# Altium PCB RNG_SATA.PcbDoc (part 1 of 2)
Units mm, origin at the board's own origin, x right, y up, seen from the top; angles counter-clockwise.
Board outline 120 x 50.5 mm, 2 copper layers (TOP, BOT), stack 1.57 mm thick; 83 components, 48 nets, 231 pads, 421 vias.
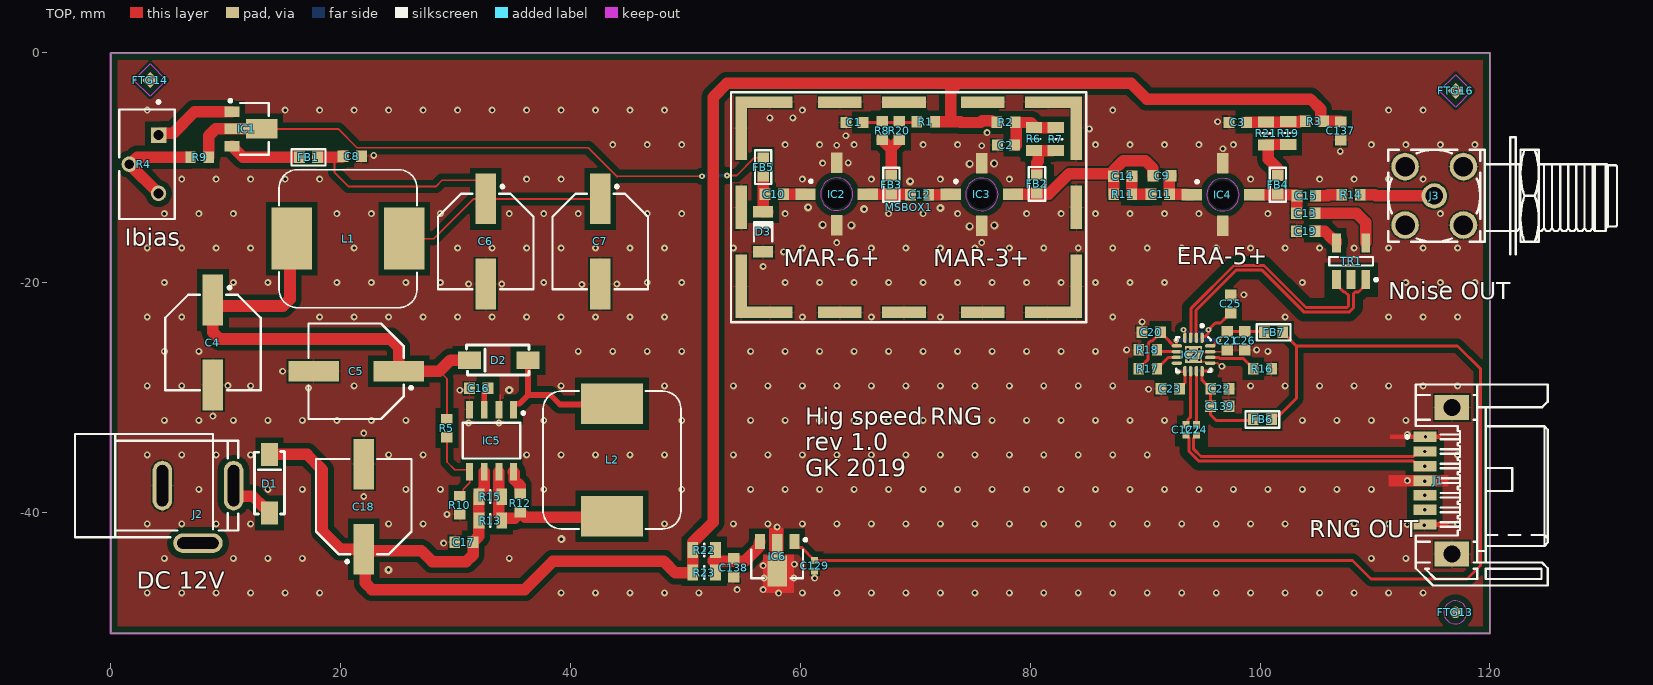
[diagram p0: TOP view]
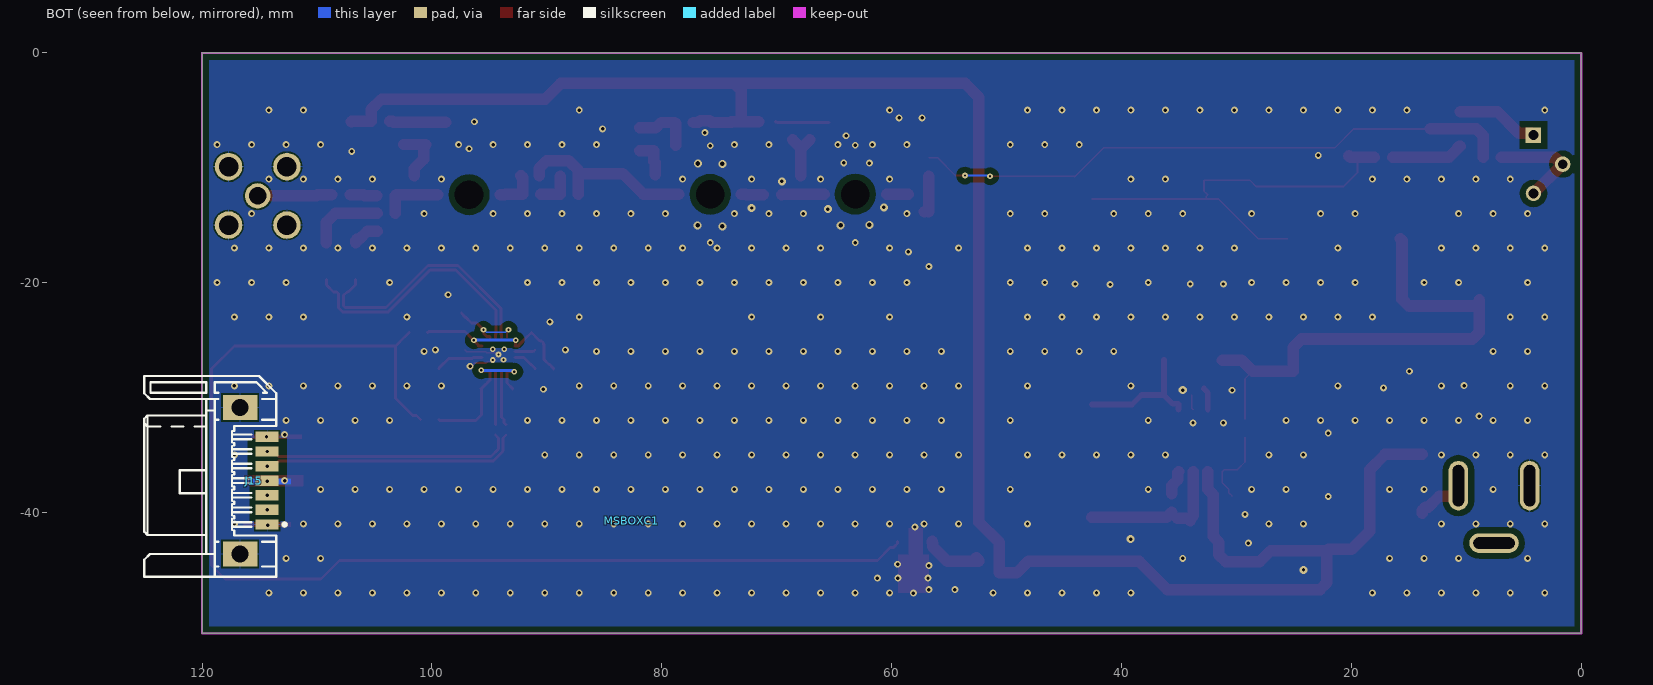
[diagram p1: BOT view, seen from below]
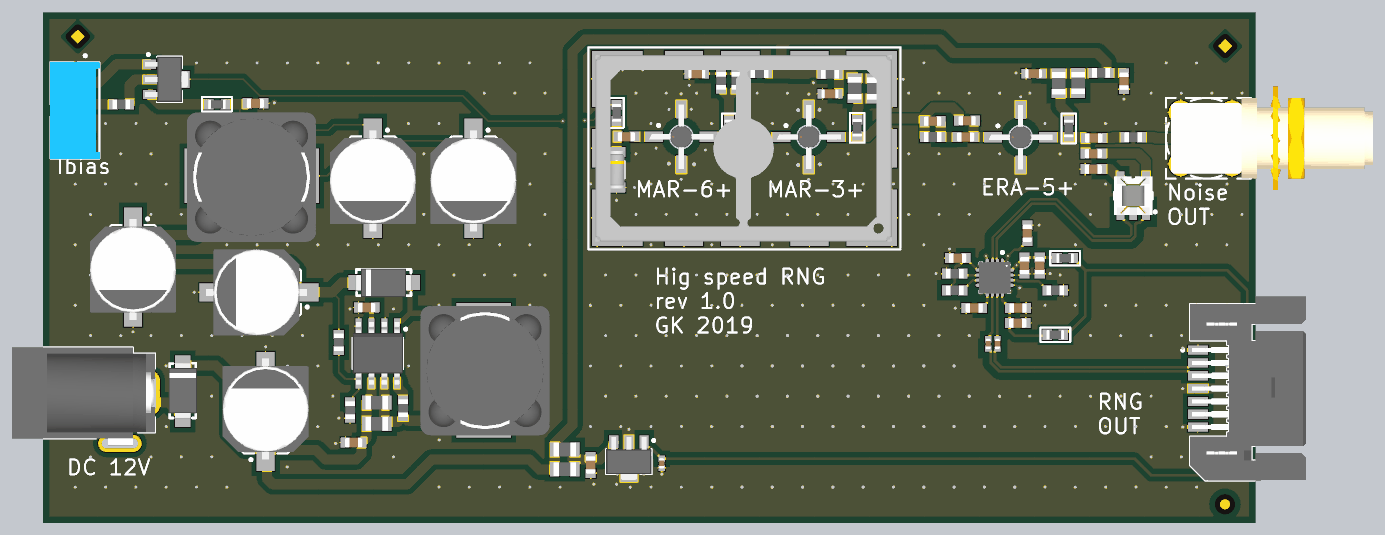
[diagram p2: 3D render of the assembled board from above, using the file's embedded part models]

## Layer stack, top to bottom
TopSolder: solder mask 0.01, Solder Resist, Dk 3.5
TOP: signal copper 0.035
Dielectric2: core 1.5, Core-042, Dk 4.6
BOT: signal copper 0.035
BottomSolder: solder mask 0.01, Solder Resist, Dk 3.5

## Board outline
0,-41 0,-36 0,0 9.038,0 120,0 120,-50.5 0,-50.5

## Design rules (kind name [scope] priority, off if disabled: settings)
AcuteAngle [All] p1: minimum=6.00000000000000E+0001 checktracksonly=FALSE
Clearance clearance_Z50 [All vs InNetClass('Z50R')] p1: gap=0.152 ignorepadtopadclearanceinfootprint=FALSE
Clearance Clearance_D100 [InNetClass('Z100R')] p2: gap=0.15 ignorepadtopadclearanceinfootprint=FALSE except(0.7: Arc-Poly Track-Poly SMDPad-Poly THPad-Poly Via-Poly Fill-Poly Poly-Poly)
Clearance [All] p3: gap=0.152 ignorepadtopadclearanceinfootprint=FALSE except(0.178: Arc-Via Track-Via SMDPad-Via THPad-Via Via-Via Via-Fill Via-Region Via-Text Via-Hole; 0.254: Poly-Region Poly-Text Poly-Hole; 0.508: Arc-Poly Track-Poly SMDPad-Poly THPad-Poly Via-Poly Fill-Poly Poly-Poly)
DiffPairsRouting [All] p1: maxlimit=0.152 minlimit=0.127 mostfreqgap=0.152 toplayer_minwidth=0.259 toplayer_maxwidth=0.352 toplayer_prefwidth=0.352 bottomlayer_maxgap=0.127 bottomlayer_prefgap=0.127 bottomlayer_minwidth=0.259 bottomlayer_maxwidth=0.263 bottomlayer_prefwidth=0.259 impedanceprofiledriven=TRUE impedanceprofileid={E0909D4E-DC6C-4CAC-BB10-8BE2BD85E6DE} impedanceprofilevalue=100.000000 maxuncoupledlength=12.7
HoleSize [All] p1: absolutevalues=TRUE maxlimit=5.08 minlimit=0.025 maxpercent=80.000 minpercent=20.000
HoleToHoleClearance [All] p1: gap=0.127 allowstackedmicrovias=TRUE
MinimumSolderMaskSliver [All] p1: minsoldermaskwidth=0
MinimumSolderMaskSliver SilkscreenOverComponentPads [All] p2: minsoldermaskwidth=0
PlaneClearance [All] p1: clearance=0.203
PlaneConnect [All] p1: pad.planeconnectstyle=Relief pad.reliefexpansion=0.127 pad.reliefentries=4 pad.reliefconductorwidth=0.127 pad.reliefairgap=0.127 via.planeconnectstyle=Direct via.reliefexpansion=0.508 via.reliefentries=4 via.reliefconductorwidth=0.254 via.reliefairgap=0.254
PolygonConnect [All] p1: thpad.connectstyle=Relief thpad.reliefconductorwidth=0.127 thpad.reliefentries=4 thpad.polygonreliefangle="90 Angle" thpad.airgapwidth=0.127 smdpad.connectstyle=Relief smdpad.reliefconductorwidth=0.127 smdpad.reliefentries=4 smdpad.polygonreliefangle="90 Angle" smdpad.airgapwidth=0.127 via.connectstyle=Direct via.reliefconductorwidth=0.254 via.reliefentries=4 via.polygonreliefangle="90 Angle" via.airgapwidth=0.254
RoomDefinition RNG_SATA [InComponentClass('RNG_SATA')] p1 off: confinementstyle=ConfineIn formatcopy=TRUE lockcomponents=FALSE outline 121.152,-50.594 137.179,-50.594 137.179,-44.701 121.152,-44.701
RoutingVias [All] p1: holewidth=0.2 width=0.5 viastyle="Through Hole" minholewidth=0.2 minwidth=0.5 maxholewidth=0.5 maxwidth=1
SilkToSilkClearance [All] p1: silktosilkclearance=0
SilkToSolderMaskClearance [IsPad] p1: minsilkscreentomaskgap=0 clearancetoexposedcopper=TRUE
SolderMaskExpansion [All] p1: expansion=0.102
ViasUnderSMD ViasUnderSMD_allow [InComponent('IC18') or InComponent('IC10') or InComponent('IC13') or InComponent('IC14') or InComponent('IC15')] p1: allowed=TRUE
ViasUnderSMD [All] p2: allowed=FALSE
Width Width_50R [InNetClass('Z50R')] p1: maxlimit=2.718 minlimit=1 preferedwidth=2.718 toplayer_prefwidth=1 bottomlayer_minwidth=1.611 impedanceprofiledriven=TRUE impedanceprofileid={41EDD86A-3DF9-4644-93D1-EBC5303444B0} impedanceprofilevalue=50.000000 minimp=50.000000 maximp=50.000000 favimp=50.000000 checkconnectedcopper=TRUE
Width [All] p2: maxlimit=2.54 minlimit=0.152 preferedwidth=0.152
22 further rules are at their usual default settings.

## Classes and differential pairs
net class Z100R: CMP_N CMP_P TD_N TD_P
net class Z50R: NetC9_1 NetC9_2 NetC10_2 NetC12_1 NetC12_2 NetC13_1 NetC13_2 NetC15_1 NetJ3_1
differential pair TD: +TD_P -TD_N
differential pair CMP: +CMP_P -CMP_N

## Components (designator, comment, footprint, x,y, rotation, side; value= is the part's Value field where it differs from the comment)
C1 "1nF" CAPC1608X90N 64.707,-6.045 r0 top
C2 "1nF" CAPC1608X90N 77.892,-8.024 r0 top
C3 "1nF" CAPC1608X90N 98.059,-6.031 r0 top
C4 "220uF" CAPAE830X1020N 8.896,-25.189 r270 top
C5 "220uF" CAPAE830X1020N 21.361,-27.686 r180 top
C6 "220uF" CAPAE830X1020N 32.635,-16.399 r270 top
C7 "220uF" CAPAE830X1020N 42.592,-16.399 r270 top
C8 "10nF" CAPC1608X87N 21.018,-8.966 r180 top
C9 "1.8pF" CAPC1608X87N 91.466,-10.679 r0 top
C10 "330pF" CAPC1608X87N 57.739,-12.274 r0 top
C11 "47pF" CAPC1608X87N 91.314,-12.305 r0 top
C12 "10nF" CAPC1608X87N 70.376,-12.325 r180 top
C13 "10nF" CAPC1608X87N 103.971,-13.946 r0 top
C14 "1.8pF" CAPC1608X87N 88.054,-10.744 r0 top
C15 "10nF" CAPC1608X87N 104.001,-12.406 r180 top
C16 "270pF" CAPC1608X87N 32.028,-29.189 r180 top
C17 "10nF" CAPC1608X87N 30.734,-42.545 r0 top
C18 "220uF" CAPAE830X1020N 22.022,-39.472 r90 top
C19 "10nF" CAPC1608X87N 103.971,-15.492 r180 top
C20 "10nF" CAPC1608X87N 90.535,-24.302 r180 top
C21 "10nF" CAPC1608X87N 97.134,-25.033 r270 top
C22 "10nF" CAPC1608X87N 96.509,-29.23 r0 top
C23 "10nF" CAPC1608X87N 92.177,-29.23 r180 top
C24 "100nF" CAPC1005X55N 94.476,-32.79 r270 top
C25 "1uF" CAPC1608X87N 97.434,-21.838 r90 top
C26 "1uF" CAPC1608X87N 98.655,-25.033 r90 top
C127 "100nF" CAPC1005X55N 93.563,-32.79 r90 top
C129 "100nF" CAPC1005X55N 61.239,-44.602 r270 top
C137 "1uF" CAPC1608X87N 107,-6.781 r90 top
C138 "1uF" CAPC1608X87N 54.204,-44.78 r90 top
C139 "1uF" CAPC1608X87N 96.482,-30.728 r180 top
D1 "SS14" DO-214AC/SMA 13.822,-37.481 r90 top
D2 "SS14" DO-214AC/SMA 33.77,-26.723 r180 top
D3 "BZV55-B24" DIOMELF3515N 56.767,-15.553 r270 top
FB1 "GZ1608D601TF" 0603L 17.211,-9.074 r180 top
FB2 "GZ1608D601TF" 0603L 80.587,-11.398 r90 top
FB3 "GZ1608D601TF" 0603L 67.912,-11.461 r90 top
FB4 "GZ1608D601TF" 0603L 101.538,-11.467 r90 top
FB5 "GZ1608D601TF" 0603L 56.767,-9.925 r270 top
FB6 "GZ1608D601TF" 0603L 100.201,-31.88 r180 top
FB7 "GZ1608D601TF" 0603L 101.168,-24.302 r180 top
FTG13 "Use only in PCB" FIDUCIAL_TOP_C100-200 116.992,-48.666 r90 top
FTG14 "Use only in PCB" FIDUCIAL_TOP_S100-200 3.429,-2.362 r90 top
FTG16 "Use only in PCB" FIDUCIAL_TOP_S100-200 117.018,-3.302 r90 top
IC1 "78L05G-AB3-R" SOT89 12.511,-6.604 r0 top
IC2 "MAR-6+" MINI-CIRCUITS_VV105 63.168,-12.285 r0 top
IC3 "MAR-3+" MINI-CIRCUITS_VV105 75.786,-12.299 r0 top
IC4 "ERA-5+" MINI-CIRCUITS_VV105 96.762,-12.33 r0 top
IC5 "MC34063AD" SOIC127P600X175-8N 33.135,-33.731 r270 top
IC6 "78L05G-AB3-R" SOT89 57.988,-44.45 r270 top
IC27 "ADCMP572BCPZ" QFN50P300X300X100-17N-S145 94.209,-26.233 r270 top
J1 "SATA" 3M_5607-4200-SH 114.325,-37.211 r90 top
J2 "Jack" CLIFF_FC68148(DC-10A) 4.496,-37.643 r270 top
J3 "SMA" RF249BT0050GHDW 115.152,-12.432 r0 top
J15 "SATA" 3M_5607-4200-SH 114.325,-37.211 r270 bottom
L1 "SWRB1207S-471MT" choke_DLCSS124 15.752,-16.154 r0 top
L2 "SWRB1207S-471MT" choke_DLCSS124 43.619,-40.31 r90 top
MSBOX1 "Metal Screening Box 12 Pins" MSBOX_TE_2118728-2 69.435,-13.425 r180 top locked
MSBOXC1 "Top Cover" MSBOX_TE_2118727-2 82.626,-40.691 r0 bottom
R1 "12" RESC1608X55N 70.915,-5.975 r0 top
R2 "12" RESC1608X55N 77.892,-6.045 r180 top
R3 "12" RESC1608X55N 104.728,-5.955 r0 top
R4 "3386H-1-501LF" BOUR-3386H 2.896,-9.677 r270 top
R5 "47k" RESC1608X55N 29.261,-32.639 r90 top
R6 "360" RESC2012X60N 80.327,-7.484 r90 top
R7 "360" RESC2012X60N 82.225,-7.499 r90 top
R8 "1k1" RESC1608X55N 67.115,-6.75 r90 top
R9 "120" RESC1608X55N 7.746,-9.074 r180 top
R10 "1k8" RESC1608X55N 30.385,-39.341 r90 top
R11 "82" RESC1608X55N 88.054,-12.305 r0 top
R12 "180" RESC1608X55N 35.635,-39.155 r90 top
R13 "3R3" RESC2012X60N 33.028,-40.691 r0 top
R14 "51" RESC1608X55N 107.913,-12.33 r0 top
R15 "3R3" RESC2012X60N 33.028,-38.605 r0 top
R16 "1k8" RESC1608X55N 100.201,-27.483 r180 top
R17 "510" RESC1608X55N 90.235,-27.483 r180 top
R18 "510" RESC1608X55N 90.235,-25.833 r180 top
R19 "150" RESC2012X60N 102.451,-6.963 r90 top
R20 "1k1" RESC1608X55N 68.623,-6.75 r90 top
R21 "150" RESC2012X60N 100.53,-6.992 r90 top
R22 "150" RESC2012X60N 51.638,-43.241 r0 top
R23 "150" RESC2012X60N 51.638,-45.203 r0 top
TR1 "1:1" XFMR_MINI-CIRCUITS_AT224 107.913,-18.12 r180 top

## Footprints (in the part's own frame and the unit in brackets; to place one, negate y for a bottom-side part, rotate by r counter-clockwise, add the part's x,y. Pads: shape width x height; smd on the part's side, far side on the other; paste and mask are expansions set on the pad)
3M_5607-4200-SH [mm] "1.27mm (.050\") Pitch, Surface Mount, Right Angle, Serial ATA Plug (SATA)"
  rect 0.9x2 smd: 1(3.81,0) 2(2.54,0) 3(1.27,0) 4(0,0) 5(-1.27,0) 6(-2.54,0) 7(-3.81,0)
  rect 2.2x3 hole 1.5: 8(-6.37,-2.36) 8(6.37,-2.36)
  silkscreen extent -9.11,-10.71 8.36,1.64, body extent -9.11,-10.71 8.36,0.79, height 4
0603L [mm]
  rect 0.95x1 smd: 1(-0.8,0) 2(0.8,0)
  silkscreen extent -1.47,-0.71 1.47,0.71, body extent -0.87,-0.47 0.88,0.48, height 0.7
BOUR-3386H [mm] "THD, 3-Leads, Body 9.53x4.83mm, Pitch 2.54mm"
  rect 1.35x1.35 hole 0.85: 1(-2.54,1.27)
  round 1.35 hole 0.85: 2(0,-1.27) 3(2.54,1.27)
  silkscreen extent -5.54,-2.16 4.76,2.67, body extent -4.79,-2.22 4.79,2.73, height 9.53
CAPAE830X1020N [mm] "Capacitor, Aluminium Electrolytric, 8.3mm L X 8.3mm W X 10.2mm H, IPC Medium Density"
  rect 4.4x1.8 smd: 1(-3.7,0) 2(3.7,0)
  silkscreen extent -4.9,-4.15 4.15,4.15, body extent -4.75,-4.25 5.25,4.25, height 10.2
CAPC1005X55N [mm] "Capacitor, Non-Polarized, Chip; 1.00mm L X 0.50mm W X 0.70mm H, IPC Medium Density"
  rect 0.62x0.62 smd: 1(-0.45,0) 2(0.45,0)
  body extent -0.52,-0.27 0.53,0.28, height 0.55
CAPC1608X87N [mm] "Chip Capacitor, Body 1.6x0.8mm IPC Medium Density"
  rect 0.95x1 smd: 1(-0.8,0) 2(0.8,0)
  body extent -0.87,-0.47 0.88,0.48, height 0.87
CAPC1608X90N [mm] "Chip Capacitor, Body 1.6x0.8mm IPC Medium Density"
  rect 0.95x0.95 smd: 1(-0.75,0) 2(0.75,0)
  body extent -0.85,-0.45 0.85,0.45, height 0.9
choke_DLCSS124 [mm] "Maritex"
  rect 3.5x5.4 smd: 1(0,0) 2(9.8,0)
  silkscreen extent -1.1,-6 10.9,6, body extent -1.52,-6.53 11.28,6.27, height 8
CLIFF_FC68148(DC-10A) [mm] "12V /  5A, 2.1mm Diameter Pin, DC Power Socket With  Switch. DC10A Type"
  rrect100% 4.3x1.7 hole 1 slot 3.6 at 0 deg: 1(0,6.2) 3(0,0)
  rrect100% 1.7x4.3 hole 1 slot 3.6 at 90 deg: 2(5,3.1)
  silkscreen extent -4.5,-7.6 4.5,6.6, body extent -4.5,-7.6 5.2,6.6, height 11
DIOMELF3515N [mm] "SOD80C, MELF Diode, 2-Leads, Body 3.5x1.5mm, IPC Medium Density"
  rect 1x1.75 smd: 1(-1.75,0) 2(1.75,0)
  silkscreen extent -0.85,-0.8 0.85,0.8, body extent -1.85,-0.8 1.85,0.8, height 1.6
DO-214AC/SMA [mm]
  rect 2x1.5 smd: A(-2.55,0) K(2.55,0)
  silkscreen extent -2.64,-1.3 2.79,1.3, body extent -2.67,-1.4 2.83,1.4, height 2.3
FIDUCIAL_TOP_C100-200 [mm] "Round Fiducial Target, Top Layer, 1.0mm, Top Solder 2.0mm, Keepout =2.0mm"
  round 1 smd paste-0.51 mask+0.5: FTG2(0,0)
  TOP keep-out circle w0.1: c0,0 r1
FIDUCIAL_TOP_S100-200 [mm] "Square Fiducial Target, Top Layer, 1.0mm, Top Solder 2.0mm, Keepout =2.0mm"
  rect 1x1 smd rot 45 paste-0.51 mask+0.5: 1(0,0)
  TOP keep-out region: 1.414,0 0,-1.414 -1.414,0 0,1.414
MINI-CIRCUITS_VV105 [mm] "MINI-CIRCUITS VV105 Case"
  rect 1.78x1.02 smd: 1(-2.718,0) 3(2.718,0)
  rect 1.02x1.78 smd: 2(0,-2.718) 4(0,2.718)
  round 1 hole 2.5 unplated mask+0.75: 5(0,0)
  silkscreen extent -2.37,1 -2.12,1.25, body extent -3.17,-3.18 3.18,3.17, height 1.22
MSBOX_TE_2118727-2 [mm] "Cover for Frame of Standard Surface Mount Shield (Two Piece), External Dimensions 29.36 x 18.5mm"
  body extent -14.98,-9.55 14.98,9.55, height 7
MSBOX_TE_2118728-2 [mm] "Frame of Standard Surface Mount Shield (Two Piece), External Dimensions 29.36 x 18.5mm"
  rect 1x5.55 smd: 1(-14.58,-6.875) 5(14.58,-6.875) 7(14.58,6.875) 11(-14.58,6.875)
  rect 3.98x1 smd: 1(-12.09,-9.15) 5(12.09,-9.15) 7(12.09,9.15) 11(-12.09,9.15)
  rect 3.8x1 smd: 2(-6.43,-9.15) 3(0.42,-9.15) 4(6,-9.15) 8(6,9.15) 9(0.42,9.15) 10(-6.43,9.15)
  rect 1x3.8 smd: 6(14.58,0) 12(-14.58,0)
  silkscreen extent -15.43,-10 15.47,10, body extent -14.58,-9.25 14.78,9.25, height 7
QFN50P300X300X100-17N-S145 [mm] "QFN,0.50mm Pitch, Square; 4 Pin X 4 Pin, 3mm X 3mm X 1.00mm H Body (w/Thermal Tab 1.45 X 1.45mm), IPC Medium Density"
  oval 0.9x0.3 smd: 1(-1.45,0.75) 2(-1.45,0.25) 3(-1.45,-0.25) 4(-1.45,-0.75) 9(1.45,-0.75) 10(1.45,-0.25) 11(1.45,0.25) 12(1.45,0.75)
  oval 0.3x0.9 smd: 5(-0.75,-1.45) 6(-0.25,-1.45) 7(0.25,-1.45) 8(0.75,-1.45) 13(0.75,1.45) 14(0.25,1.45) 15(-0.25,1.45) 16(-0.75,1.45)
  rect 1.45x1.45 smd: 17(0,0)
  silkscreen extent -2.62,-1.5 1.5,1.5, body extent -1.57,-1.57 1.58,1.58, height 1
RESC1608X55N [mm] "Chip Resistor, EIA 0603, Metric 1608, Body 1.6x0.8mm, IPC Medium Density"
  rect 0.9x1 smd: 1(-0.8,0) 2(0.8,0)
  body extent -0.87,-0.47 0.88,0.48, height 0.55
RESC2012X60N [mm] "Chip Resistor, EIA 0805, Metric 2012, Body 2.0x1.2mm, IPC Medium Density"
  rect 0.95x1.4 smd: 1(-1,0) 2(1,0)
  silkscreen extent 0,-0.55 0,0.55, body extent -1.1,-0.67 1.1,0.68, height 0.6
RF249BT0050GHDW [mm] "50 Ohm Through Hole SMA Right Angle PCB Jack"
  round 2.2 hole 1.5: 1(0,0)
  round 2.4 hole 1.7: 2(-2.54,-2.54) 2(-2.54,2.54) 2(2.54,-2.54) 2(2.54,2.54)
  silkscreen extent -4,-5.1 15.9,5.1, body extent -3.5,-5.1 16.47,5.1, height 11.45
SOIC127P600X175-8N [mm] "SOIC 8, Pitch 1.27mm - Body 4x5mm, IPC Medium Density"
  rect 1.55x0.6 smd: 1(-2.7,1.905) 2(-2.7,0.635) 3(-2.7,-0.635) 4(-2.7,-1.905) 5(2.7,-1.905) 6(2.7,-0.635) 7(2.7,0.635) 8(2.7,1.905)
  silkscreen extent -2.52,-2.5 1.55,2.88, body extent -3.1,-2.5 3.1,2.5, height 1.75
SOT89 [mm] "SOT89-3, 3-Leads, Body 2.48x4.5mm"
  rect 1.3x0.9 smd: 1(-1.965,1.5) 3(-1.965,-1.5)
  rect 1.9x0.9 smd: 2(-1.665,0)
  rect 2.7x1.7 smd: 2(0.635,0)
  silkscreen extent -2.22,-2.25 1.24,2.57, body extent -2.44,-2.25 1.81,2.25, height 1.6
XFMR_MINI-CIRCUITS_AT224 [mm] "MINI-CIRCUITS RF Transformer, Case AT224 - Body 3.81X3.81mm"
  rect 0.76x1.65 smd: 1(-1.27,1.59) 2(0,1.59) 3(1.27,1.59) 4(1.27,-1.59) 6(-1.27,-1.59)
  silkscreen extent -2.3,-0.37 1.91,1.72, body extent -1.9,-1.9 1.91,1.91, height 3.81

## Part data
C1 C2 C3: library part CC0603_1NF_50V_1%_NP0, "Non-polarised capacitor", Case=0603, Manufacturer=GENERIC, Manufacturer1 ComponentHeight=0.9mm, Manufacturer1 Example=AVX, Manufacturer1 Part Number=06035A102FAT2A, Tolerance=±1%, Voltage=50V, Author="CERN DEM JLC", Component Type=Standard, CreateDate=15.06.2017, HelpURL=\\cern.ch\dfs\Applications\Altium\Datasheets\CC0603_C0G_AVX.pdf, LatestRevisionDate=15.06.2017, Manufacturer Part Number=CC0603_1NF_50V_1%_NP0, Mounted=Yes, Part Description="SMD Multilayer Chip Ceramic Capacitor", Part Number=CC0603_1NF_50V_1%_NP0, Pin Count=2, Sense=No, SMD=Yes, Socket=No, Status=None, TC=C0G/NP0
C4 C5 C6 C7 C18: library part CAE830-1020_220UF_35V_20%, "Polarised capacitor", Case=F, Manufacturer=PANASONIC, Manufacturer Part Number=EEEFK1V221AP, Tolerance=±20%, Voltage=35V, Author="CERN DEM JLC", ComponentHeight=10.2mm, Component Type=Standard, CreateDate=03.12.2007, HelpURL=\\cern.ch\dfs\Applications\Altium\Datasheets\CAE_PANASONIC_FK.pdf, LatestRevisionDate=05.11.2014, Mounted=Yes, Part Description="Aluminum Electrolytic SMT Capacitor", Part Number=CAE830-1020_220UF_35V_20%, Pin Count=2, Sense=No, SMD=Yes, Socket=No, Status="Not Recommended"
C8 C12 C13 C15 C17 C19 C20 C21 C22 C23: library part CC0603_10NF_50V_5%_C0G, "Non-polarised capacitor", Case=0603, Manufacturer=GENERIC, Manufacturer1 ComponentHeight=0.9mm, Manufacturer1 Example=TDK, Manufacturer1 Part Number=C1608C0G1H103J080AA, Tolerance=±5%, Voltage=50V, Author="CERN DEM JLC", Component Type=Standard, CreateDate=10.12.2014, HelpURL=\\cern.ch\dfs\Applications\Altium\Datasheets\CC0603_C0G_TDK_C.pdf, LatestRevisionDate=10.12.2014, Manufacturer Part Number=CC0603_10NF_50V_5%_C0G, Mounted=Yes, Part Description="SMD Multilayer Chip Ceramic Capacitor", Part Number=CC0603_10NF_50V_5%_C0G, Pin Count=2, Sense=No, SMD=Yes, Socket=No, Status=Preferred, TC=C0G/NP0
C9 C14: library part CC0603_1.8PF_50V_0.25PF_NP0, "Non-polarised capacitor", Case=0603, Manufacturer=GENERIC, Manufacturer1 ComponentHeight=0.87mm, Manufacturer1 Example=PHYCOMP, Manufacturer1 Part Number=223886715188, Tolerance=±0.25pF, Voltage=50V, Author="CERN DEM JLC", Component Type=Standard, CreateDate=03.12.2007, HelpURL=\\cern.ch\dfs\Applications\Altium\Datasheets\CC0603_NP0_PHYCOMP.pdf, LatestRevisionDate=03.12.2007, Manufacturer Part Number=CC0603_1.8PF_50V_0.25PF_NP0, Mounted=Yes, Part Description="SMD Multilayer Chip Ceramic Capacitor", Part Number=CC0603_1.8PF_50V_0.25PF_NP0, Pin Count=2, Sense=No, SMD=Yes, Socket=No, Status=Preferred, TC=C0G/NP0
C10: library part CC0603_330PF_50V_5%_NP0, "Non-polarised capacitor", Case=0603, Manufacturer=GENERIC, Manufacturer1 ComponentHeight=0.87mm, Manufacturer1 Example=PHYCOMP, Manufacturer1 Part Number=223886715331, Tolerance=±5%, Voltage=50V, Author="CERN DEM JLC", Component Type=Standard, CreateDate=03.12.2007, HelpURL=\\cern.ch\dfs\Applications\Altium\Datasheets\CC0603_NP0_PHYCOMP.pdf, LatestRevisionDate=03.12.2007, Manufacturer Part Number=CC0603_330PF_50V_5%_NP0, Mounted=Yes, Part Description="SMD Multilayer Chip Ceramic Capacitor", Part Number=CC0603_330PF_50V_5%_NP0, Pin Count=2, Sense=No, SMD=Yes, Socket=No, Status=Preferred, TC=C0G/NP0
C11: library part CC0603_47PF_50V_5%_NP0, "Non-polarised capacitor", Case=0603, Manufacturer=GENERIC, Manufacturer1 ComponentHeight=0.87mm, Manufacturer1 Example=PHYCOMP, Manufacturer1 Part Number=223886715479, Tolerance=±5%, Voltage=50V, Author="CERN DEM JLC", Component Type=Standard, CreateDate=03.12.2007, HelpURL=\\cern.ch\dfs\Applications\Altium\Datasheets\CC0603_NP0_PHYCOMP.pdf, LatestRevisionDate=03.12.2007, Manufacturer Part Number=CC0603_47PF_50V_5%_NP0, Mounted=Yes, Part Description="SMD Multilayer Chip Ceramic Capacitor", Part Number=CC0603_47PF_50V_5%_NP0, Pin Count=2, Sense=No, SMD=Yes, Socket=No, Status=Preferred, TC=C0G/NP0
C16: library part CC0603_270PF_50V_5%_NP0, "Non-polarised capacitor", Case=0603, Manufacturer=GENERIC, Manufacturer1 ComponentHeight=0.87mm, Manufacturer1 Example=PHYCOMP, Manufacturer1 Part Number=223886715271, Tolerance=±5%, Voltage=50V, Author="CERN DEM JLC", Component Type=Standard, CreateDate=03.12.2007, HelpURL=\\cern.ch\dfs\Applications\Altium\Datasheets\CC0603_NP0_PHYCOMP.pdf, LatestRevisionDate=03.12.2007, Manufacturer Part Number=CC0603_270PF_50V_5%_NP0, Mounted=Yes, Part Description="SMD Multilayer Chip Ceramic Capacitor", Part Number=CC0603_270PF_50V_5%_NP0, Pin Count=2, Sense=No, SMD=Yes, Socket=No, Status=Preferred, TC=C0G/NP0
C24 C127 C129: library part CC0402_100NF_16V_10%_X7R, "Non-polarised capacitor", Case=0402, Manufacturer=GENERIC, Manufacturer1 ComponentHeight=0.55mm, Manufacturer1 Example=MURATA, Manufacturer1 Part Number=GRM155R71C104KA88D, Tolerance=±10%, Voltage=16V, Author="CERN DEM JLC", Component Type=Standard, CreateDate=05/12/2013, HelpURL=\\cern.ch\dfs\Applications\Altium\Datasheets\CC0402_X7R_MURATA_GRM.pdf, LatestRevisionDate=03/12/2007, Manufacturer Part Number=CC0402_100NF_16V_10%_X7R, Mounted=Yes, Part Description="SMD Multilayer Chip Ceramic Capacitor", Part Number=CC0402_100NF_16V_10%_X7R, Pin Count=2, SMD=Yes, Socket=No, Status="Not Recommended", Table="Capacitors SMD", TC=X7R
C25 C26 C137 C138 C139: library part CC0603_1UF_16V_10%_X7R, "Non-polarised capacitor", Case=0603, Manufacturer=GENERIC, Manufacturer1 ComponentHeight=0.87mm, Manufacturer1 Example=PHYCOMP, Manufacturer1 Part Number=223824613663, Manufacturer Part Number=CC0603_1uF_16V_10%_X7R, Tolerance=±10%, Voltage=16V, Author="CERN DEM JLC", Component Type=Standard, CreateDate=03/12/2007, HelpURL=\\cern.ch\dfs\Applications\Altium\Datasheets\CC0805_X5R_PHYCOMP_HC.pdf, LatestRevisionDate=03/12/2007, Mounted=Yes, Part Description="SMD Multilayer Chip Ceramic Capacitor", Part Number=CC0603_1UF_16V_10%_X7R, Pin Count=2, SMD=Yes, Socket=No, Status=Preferred, Table="Capacitors SMD", TC=X7R
D1 D2: library part D_SS14, "1A 80V shottky diode (Maritex)", Supplier Part Number 1=SS14-E3/5ATGITR-ND, Supplier 1=Digi-Key
D3: "Zener Diode", Case=SOD-80C, Manufacturer=NEXPERIA, Power=500mW, Voltage=24V, Author="CERN DEM JLC", Bonding=No, ComponentHeight=1.6mm, Component Type=Standard, CreateDate=15.10.2008, Device=BZV55-B24, HelpURL=\\cern.ch\dfs\Applications\Altium\Datasheets\BZV55.pdf, LatestRevisionDate=22.01.2018, Manufacturer Part Number=BZV55-B24, Mounted=Yes, PackageDescription="SOD80C, MELF Diode, 2-Leads, Body 3.5x1.5mm, IPC Medium Density", Part Description="Voltage Regulator Diode", Part Number=BZV55-B24, Pin Count=2, PressFit=No, Sense=No, SMD=Yes, Socket=No
FB1 FB2 FB3 FB4 FB5 FB6 FB7: library part L_FERRITE_BEAD_0603, "ferrite bead 100R@100MHz 1A", Supplier Part Number 1=89R3144, Supplier 1=Newark
FTG13: library part FIDUCIAL_TARGET_C100-200, "Fiducial Target", Author="CERN DEM JLC", ComponentHeight=0mm, Component Type="Standard (No BOM)", CreateDate=09.02.2010, Family=Fiducial, HelpURL=Undefined, LatestRevisionDate=04.04.2012, Mounted=No, PackageDescription="Round Fiducial Target, Top Layer, 1.0mm, Top Solder 2.0mm, Keepout =2.0mm", Part Description="Round Fiducial Target, Top Layer, 1.0mm, Top Solder 2.0mm, Keepout =2.0mm", Part Number=FIDUCIAL_TARGET_C100-200, Pin Count=1, Sense=No, SMD=Yes, Socket=No, Status=None
FTG14 FTG16: library part FIDUCIAL_TARGET_S100-200, "Fiducial Target", Author="CERN DEM JLC", ComponentHeight=0mm, Component Type="Standard (No BOM)", CreateDate=09.02.2010, Family=Fiducial, HelpURL=Undefined, LatestRevisionDate=04.04.2012, Mounted=No, PackageDescription="Square Fiducial Target, Top Layer, 1.0mm, Top Solder 2.0mm, Keepout =2.0mm", Part Description="Square Fiducial Target, Top Layer, 1.0mm, Top Solder 2.0mm, Keepout =2.0mm", Part Number=FIDUCIAL_TARGET_S100-200, Pin Count=1, Sense=No, SMD=Yes, Socket=No, Status=None
IC1 IC6: library part L78L05ACUTR, "3-Terminal Regulator 1=OUT 2=GND 3=IN", Case=SOT89, Manufacturer="ST MICROELECTRONICS", Author="CERN DEM JLC", Bonding=No, ComponentHeight=1.6mm, Component Type=Standard, CreateDate=10.10.2011, Device=L78L05ACUTR, HelpURL=\\cern.ch\dfs\Applications\Altium\Datasheets\L78L05ACUTR.pdf, LatestRevisionDate=06.12.2011, Manufacturer Part Number=L78L05ACUTR, Mounted=Yes, PackageDescription="SOT89-3, 3-Leads, Body 2.44x4.5mm", Part Description="5V 100mA Positive Voltage Regulator", Part Number=L78L05ACUTR, Pin Count=4, PressFit=No, Sense=No, SMD=Yes, Socket=No
IC2 IC3: "Monolithic Amplifier DC-2GHz", Manufacturer=MINI-CIRCUITS, Author="CERN DEM MR", Bonding=No, ComponentHeight=1.22mm, Component Type=Standard, CreateDate=02.10.2017, HelpURL=\\cern.ch\dfs\Applications\Altium\Datasheets\ERA-3+.pdf, LatestRevisionDate=02.10.2017, Mounted=Yes, PackageDescription="MINI-CIRCUITS VV105 Case, Body 2.16mm Diameter X 1.22mm H", Part Description="DC-2GHz Monolithic Amplifier", Pin Count=4, PressFit=No, Sense=No, SMD=Yes, Socket=No
  IC2: Device=MAR-6+, Manufacturer Part Number=MAR-6+, Part Number=MAR-6+
  IC3: Device=MAR-3+, Manufacturer Part Number=MAR-3+, Part Number=MAR-3+
IC4: "Monolithic Amplifier DC-4GHz", Manufacturer=MINI-CIRCUITS, Author="CERN DEM MR", Bonding=No, ComponentHeight=1.22mm, Component Type=Standard, CreateDate=02.10.2017, Device=ERA-5+, HelpURL=\\cern.ch\dfs\Applications\Altium\Datasheets\ERA-3+.pdf, LatestRevisionDate=02.10.2017, Manufacturer Part Number=ERA-5+, Mounted=Yes, PackageDescription="MINI-CIRCUITS VV105 Case, Body 2.16mm Diameter X 1.22mm H", Part Description="DC-4GHz Monolithic Amplifier", Part Number=ERA-5+, Pin Count=4, PressFit=No, Sense=No, SMD=Yes, Socket=No
IC5: "3V to 40V 1.5A Peak Boost/Buck/Inverting Switching Regulator", Case=SOIC8, Manufacturer="TEXAS INSTRUMENTS", Author="CERN DEM JLC", Bonding=No, ComponentHeight=1.75mm, Component Type=Standard, CreateDate=27.10.2009, Device=MC34063AD, HelpURL=\\cern.ch\dfs\Applications\Altium\Datasheets\MC34063AD.pdf, LatestRevisionDate=27.10.2009, Manufacturer Part Number=MC34063AD, Mounted=Yes, PackageDescription="SOIC 8, Pitch 1.27mm, Body 4x5mm, IPC Medium Density", Part Description="3V to 40V 1.5A Peak Boost/Buck/Inverting Switching Regulator", Part Number=MC34063AD, Pin Count=8, PressFit=No, Sense=No, SMD=Yes, Socket=No
IC27: library part ADCMP573BCPZ, "Ultrafast 3.3V/5V Single-Supply SiGe Comparator", Case=QFN16, Manufacturer="ANALOG DEVICES", Author="CERN DEM JLC", ComponentHeight=1.0mm, Component Type=Standard, CreateDate=17/07/2014, Device=ADCMP572BCPZ, HelpURL=\\cern.ch\dfs\Applications\Altium\Datasheets\ADCMP573BCPZ.pdf, LatestRevisionDate=18/07/2014, Manufacturer Part Number=ADCMP572BCPZ, Mounted=Yes, PackageDescription="QFN,0.50mm Pitch, Square; 4 Pin X 4 Pin, 3mm X 3mm X 1.00mm H Body (w/Thermal Tab 1.45 X 1.45mm), IPC Medium Density", Part Description="Ultrafast 3.3V/5V Single-Supply SiGe Comparator", Part Number=ADCMP572BCPZ, Pin Count=17, SMD=Yes, Socket=No, Table="Operational Amplifiers"
J1 J15: library part 3M_5607-4200-SH, "7 Pin + 1 Shield SATA Receptacle", Manufacturer=3M, Manufacturer Part Number=5607-4200-SH, Author="CERN DEM JLC", ComponentHeight=4mm, Component Type=Standard, CreateDate=14.02.2011, Family=SATA, HelpURL=\\cern.ch\dfs\Applications\Altium\Datasheets\3M_5607-4200-SH.pdf, LatestRevisionDate=31.05.2011, Mounted=Yes, Part Description="Signal Plug, Surfacemount, Right Angle,  Serial Advanced Technology Attachment (SATA) Connector, 5607 Series", Part Number=3M_5607-4200-SH, Pin Count=8, PressFit=No, Sense=No, SMD=Yes, Socket=No, Status=None
J2: library part CLIFF_FC68148(DC-10A), "12V /  5A, 2.1mm Diameter Pin, DC Power Socket With  Switch. DC10A Type", Manufacturer="CLIFF ELECTRONIC COMPONENTS", Manufacturer Part Number="FC68148 (DC-10A)", Author="CERN DEM JLC", ComponentHeight=11mm, Component Type=Standard, CreateDate=23.11.2010, Family=Jack, HelpURL=\\cern.ch\dfs\Applications\Altium\Datasheets\CLIFF_FC68148(DC-10A).pdf, LatestRevisionDate=23.11.2010, Mounted=Yes, Part Description="12V/5A, 2.1mm Diameter Pin, DC Power Socket With  Switch (DC10A Type)", Part Number=CLIFF_FC68148(DC-10A), Pin Count=3, PressFit=No, Sense=No, SMD=No, Socket=No, Status=None
J3: "50 Ohm Through Hole SMA Right Angle PCB Jack", Manufacturer=AdamTech, Manufacturer Part Number=RF249BT0050GHDW, Part Number=AdamTech_RF249BT0050GHDW, Author=GK, ComponentHeight=10.44mm, Component Type=Standard, CreateDate=06.10.2016, Family=SMA, HelpURL=\\cern.ch\dfs\Applications\Altium\Datasheets\AMPHENOL_132203.pdf, LatestRevisionDate=06.10.2016, Mounted=Yes, Part Description="50 Ohm Through Hole SMA Right Angle PCB Jack", Pin Count=5, PressFit=No, Sense=No, SMD=No, Socket=No, Status=None
L1 L2: library part L_POWER_CSS124, "inductor", Supplier Part Number 1=1864453, Supplier 1=Farnell
MSBOX1: Manufacturer="Tyco Electronics", Manufacturer Part Number=BMI-S-202-F, Part Number=MSBOX_TE_2118728-2, Author=GK, ComponentHeight=7, Component Type=Standard, CreateDate=15.06.2017, HelpURL=\\cern.ch\dfs\Applications\Altium\Datasheets\MSBOX_LAIRD_BMI-S-202-F.pdf, LatestRevisionDate=15.06.2017, Mounted=Yes, PackageDescription="Frame of Standard Surface Mount Shield (Two Piece), External Dimensions 16.5 x 16.5mm", Part Description="Frame of Standard Surface Mount Shield (Two Piece), External Dimensions 16.5 x 16.5mm", Pin Count=12, PressFit=No, Sense=No, SMD=Yes, Socket=No, Status=None
MSBOXC1: "Metal Screening Box - Top Cover 0 Pin", Manufacturer="Tyco Electronics", Manufacturer Part Number=2118727-2, Part Number=MSBOX_TE_2118727-2, Author=GK, ComponentHeight=2mm, Component Type=Standard, CreateDate=15.06.2017, HelpURL=\\cern.ch\dfs\Applications\Altium\Datasheets\MSBOX_LAIRD_BMI-S-202-C.pdf, LatestRevisionDate=15.06.2017, Mounted=Yes, PackageDescription="Cover for Frame of Standard Surface Mount Shield (Two Piece), External Dimensions 16.5 x 16.5mm", Part Description="Cover for Frame of Standard Surface Mount Shield (Two Piece), External Dimensions 16.5 x 16.5mm", Pin Count=0, PressFit=No, Sense=No, SMD=Yes, Socket=No, Status=None
R1 R2 R3: library part R0603_12R_1%_0.1W_100PPM, "Resistor - 1%", Case=0603, Manufacturer=GENERIC, Manufacturer1 ComponentHeight=0.55mm, Manufacturer1 Example="NIC COMPONENT", Manufacturer1 Part Number=NRC06F12R0TRF, Power=0.1W, Tolerance=±1%, Author="CERN DEM JLC", Component Type=Standard, CreateDate=03.12.2007, HelpURL=\\cern.ch\dfs\Applications\Altium\Datasheets\R0603_NIC_NRC.pdf, LatestRevisionDate=13.03.2008, Manufacturer Part Number=R0603_12R_1%_0.1W_100PPM, Mounted=Yes, Part Description="General Purpose Thick Film Chip Resistor", Part Number=R0603_12R_1%_0.1W_100PPM, Pin Count=2, PressFit=No, Sense=No, SMD=Yes, Socket=No, Status=Preferred, TC=±100ppm/°C
R4: library part CMP-2000-05591-1, "Square Trimpot(R) Trimming Potentiometer, 500 Ohm, +/- 10%, 0.5 W, -55 to 125 degC, 3-Pin THD, RoHS, Tube", Manufacturer=Bourns, Operating Temperature=-55to125C, Package Description="3-Pin Through Hole Device, Body 9.53 x 4.83 mm, Pitch 2.54 mm", Package Reference=3386H, Power Rating=0.5(1/2)W, Resistance Value=500Ohm, Temperature Coefficient=100ppm/C, Tolerance=10%, COO=CR, Datasheet URL=http://www.bourns.com/docs/Product-Datasheets/3386.pdf, Datasheet Version=05/2016, Dimension=9.53x4.83x9.53mm, ECCN=EAR99, Failure Rate=N/R, Family=3386, HTS=8533408050, Linear Or Logarithmic=Lin, Manufacturer URL=http://www.bourns.com/, Military Standard=N/R, Mounting=ThroughHole, Mounting Technology=ThroughHole, Number of Turns=1(Elec),1(Mech)Turns, Packaging=Tube, Part No=3386H-1-501LF, Product Weight=0.85g, RoHS=Yes, Shaft Diameter=3.15mm, Supplier=Bourns, Supplier Standard Pack=50, Technology=Cermet, Termination Style=Pin, Type=Trimmer
R5: library part R0603_47K_1%_0.1W_100PPM, "Resistor - 1%", Case=0603, Manufacturer=GENERIC, Manufacturer1 ComponentHeight=0.55mm, Manufacturer1 Example="NIC COMPONENT", Manufacturer1 Part Number=NRC06F4702TRF, Power=0.1W, Tolerance=±1%, Author="CERN DEM JLC", Component Type=Standard, CreateDate=03.12.2007, HelpURL=\\cern.ch\dfs\Applications\Altium\Datasheets\R0603_NIC_NRC.pdf, LatestRevisionDate=13.03.2008, Manufacturer Part Number=R0603_47K_1%_0.1W_100PPM, Mounted=Yes, Part Description="General Purpose Thick Film Chip Resistor", Part Number=R0603_47K_1%_0.1W_100PPM, Pin Count=2, PressFit=No, Sense=No, SMD=Yes, Socket=No, Status=Preferred, TC=±100ppm/°C
R6 R7: library part R0805_360R_1%_0.125W_100PPM, "Resistor - 1%", Case=0805, Manufacturer=GENERIC, Manufacturer1 ComponentHeight=0.6mm, Manufacturer1 Example="NIC COMPONENT", Manufacturer1 Part Number=NRC10F3600TRF, Power=0.125W, Tolerance=±1%, Author="CERN DEM JLC", Component Type=Standard, CreateDate=03.12.2007, HelpURL=\\cern.ch\dfs\Applications\Altium\Datasheets\R0805_NIC_NRC.pdf, LatestRevisionDate=13.03.2008, Manufacturer Part Number=R0805_360R_1%_0.125W_100PPM, Mounted=Yes, Part Description="General Purpose Thick Film Chip Resistor", Part Number=R0805_360R_1%_0.125W_100PPM, Pin Count=2, PressFit=No, Sense=No, SMD=Yes, Socket=No, Status=Preferred, TC=±100ppm/°C
R8 R20: library part R0603_1K1_1%_0.1W_100PPM, "Resistor - 1%", Case=0603, Manufacturer=GENERIC, Manufacturer1 ComponentHeight=0.55mm, Manufacturer1 Example="NIC COMPONENT", Manufacturer1 Part Number=NRC06F1101TRF, Power=0.1W, Tolerance=±1%, Author="CERN DEM JLC", Component Type=Standard, CreateDate=03.12.2007, HelpURL=\\cern.ch\dfs\Applications\Altium\Datasheets\R0603_NIC_NRC.pdf, LatestRevisionDate=13.03.2008, Manufacturer Part Number=R0603_1K1_1%_0.1W_100PPM, Mounted=Yes, Part Description="General Purpose Thick Film Chip Resistor", Part Number=R0603_1K1_1%_0.1W_100PPM, Pin Count=2, PressFit=No, Sense=No, SMD=Yes, Socket=No, Status=Preferred, TC=±100ppm/°C
R9: library part R0603_120R_1%_0.1W_100PPM, "Resistor - 1%", Case=0603, Manufacturer=GENERIC, Manufacturer1 ComponentHeight=0.55mm, Manufacturer1 Example="NIC COMPONENT", Manufacturer1 Part Number=NRC06F1200TRF, Power=0.1W, Tolerance=±1%, Author="CERN DEM JLC", Component Type=Standard, CreateDate=03.12.2007, HelpURL=\\cern.ch\dfs\Applications\Altium\Datasheets\R0603_NIC_NRC.pdf, LatestRevisionDate=13.03.2008, Manufacturer Part Number=R0603_120R_1%_0.1W_100PPM, Mounted=Yes, Part Description="General Purpose Thick Film Chip Resistor", Part Number=R0603_120R_1%_0.1W_100PPM, Pin Count=2, PressFit=No, Sense=No, SMD=Yes, Socket=No, Status=Preferred, TC=±100ppm/°C
R10 R16: library part R0603_1K8_1%_0.1W_100PPM, "Resistor - 1%", Case=0603, Manufacturer=GENERIC, Manufacturer1 ComponentHeight=0.55mm, Manufacturer1 Example="NIC COMPONENT", Manufacturer1 Part Number=NRC06F1801TRF, Power=0.1W, Tolerance=±1%, Author="CERN DEM JLC", Component Type=Standard, CreateDate=03.12.2007, HelpURL=\\cern.ch\dfs\Applications\Altium\Datasheets\R0603_NIC_NRC.pdf, LatestRevisionDate=13.03.2008, Manufacturer Part Number=R0603_1K8_1%_0.1W_100PPM, Mounted=Yes, Part Description="General Purpose Thick Film Chip Resistor", Part Number=R0603_1K8_1%_0.1W_100PPM, Pin Count=2, PressFit=No, Sense=No, SMD=Yes, Socket=No, Status=Preferred, TC=±100ppm/°C
R11: library part R0603_82R_1%_0.1W_100PPM, "Resistor - 1%", Case=0603, Manufacturer=GENERIC, Manufacturer1 ComponentHeight=0.55mm, Manufacturer1 Example="NIC COMPONENT", Manufacturer1 Part Number=NRC06F82R0TRF, Power=0.1W, Tolerance=±1%, Author="CERN DEM JLC", Component Type=Standard, CreateDate=03.12.2007, HelpURL=\\cern.ch\dfs\Applications\Altium\Datasheets\R0603_NIC_NRC.pdf, LatestRevisionDate=13.03.2008, Manufacturer Part Number=R0603_82R_1%_0.1W_100PPM, Mounted=Yes, Part Description="General Purpose Thick Film Chip Resistor", Part Number=R0603_82R_1%_0.1W_100PPM, Pin Count=2, PressFit=No, Sense=No, SMD=Yes, Socket=No, Status=Preferred, TC=±100ppm/°C
R12: library part R0603_180R_1%_0.1W_100PPM, "Resistor - 1%", Case=0603, Manufacturer=GENERIC, Manufacturer1 ComponentHeight=0.55mm, Manufacturer1 Example="NIC COMPONENT", Manufacturer1 Part Number=NRC06F1800TRF, Power=0.1W, Tolerance=±1%, Author="CERN DEM JLC", Component Type=Standard, CreateDate=03.12.2007, HelpURL=\\cern.ch\dfs\Applications\Altium\Datasheets\R0603_NIC_NRC.pdf, LatestRevisionDate=13.03.2008, Manufacturer Part Number=R0603_180R_1%_0.1W_100PPM, Mounted=Yes, Part Description="General Purpose Thick Film Chip Resistor", Part Number=R0603_180R_1%_0.1W_100PPM, Pin Count=2, PressFit=No, Sense=No, SMD=Yes, Socket=No, Status=Preferred, TC=±100ppm/°C
R13 R15: library part R0805_3R3_1%_0.125W_200PPM, "Resistor - 1%", Case=0805, Manufacturer=GENERIC, Manufacturer1 ComponentHeight=0.65mm, Manufacturer1 Example="YAGEO PHYCOMP", Manufacturer1 Part Number="232273463308L or RC0805FR-073R3L", Power=0.125W, Tolerance=±1%, Author="CERN DEM JLC", Component Type=Standard, CreateDate=03.12.2007, HelpURL=\\cern.ch\dfs\Applications\Altium\Datasheets\R0805_Phycomp_RC0805.pdf, LatestRevisionDate=17.10.2012, Manufacturer Part Number=R0805_3R3_1%_0.125W_200PPM, Mounted=Yes, Part Description="General Purpose Thick Film Chip Resistor", Part Number=R0805_3R3_1%_0.125W_200PPM, Pin Count=2, PressFit=No, Sense=No, SMD=Yes, Socket=No, Status=Preferred, TC=±200ppm/°C
R14: library part R0603_51R_1%_0.1W_100PPM, "Resistor - 1%", Case=0603, Manufacturer=GENERIC, Manufacturer1 ComponentHeight=0.55mm, Manufacturer1 Example="NIC COMPONENT", Manufacturer1 Part Number=NRC06F51R0TRF, Power=0.1W, Tolerance=±1%, Author="CERN DEM JLC", Component Type=Standard, CreateDate=03.12.2007, HelpURL=\\cern.ch\dfs\Applications\Altium\Datasheets\R0603_NIC_NRC.pdf, LatestRevisionDate=13.03.2008, Manufacturer Part Number=R0603_51R_1%_0.1W_100PPM, Mounted=Yes, Part Description="General Purpose Thick Film Chip Resistor", Part Number=R0603_51R_1%_0.1W_100PPM, Pin Count=2, PressFit=No, Sense=No, SMD=Yes, Socket=No, Status=Preferred, TC=±100ppm/°C
R17 R18: library part R0603_510R_1%_0.1W_100PPM, "Resistor - 1%", Case=0603, Manufacturer=GENERIC, Manufacturer1 ComponentHeight=0.5mm, Manufacturer1 Example=VISHAY, Manufacturer1 Part Number=CRCW0603510RFKEA, Power=0.1W, Tolerance=±1%, Author="CERN DEM JLC", Component Type=Standard, CreateDate=03.12.2007, HelpURL="\\cern.ch\dfs\Applications\Altium\Datasheets\R0603_VISHAY_CRCW e3.pdf", LatestRevisionDate=21.03.2018, Manufacturer Part Number=R0603_510R_1%_0.1W_100PPM, Mounted=Yes, Part Description="General Purpose Thick Film Chip Resistor", Part Number=R0603_510R_1%_0.1W_100PPM, Pin Count=2, PressFit=No, Sense=No, SMD=Yes, Socket=No, Status=Preferred, TC=±100ppm/°C
R19 R21 R22 R23: library part R0805_150R_1%_0.125W_100PPM, "Resistor - 1%", Case=0805, Manufacturer=GENERIC, Manufacturer1 ComponentHeight=0.6mm, Manufacturer1 Example="NIC COMPONENT", Manufacturer1 Part Number=NRC10F1500TRF, Power=0.125W, Tolerance=±1%, Author="CERN DEM JLC", Component Type=Standard, CreateDate=03.12.2007, HelpURL=\\cern.ch\dfs\Applications\Altium\Datasheets\R0805_NIC_NRC.pdf, LatestRevisionDate=13.03.2008, Manufacturer Part Number=R0805_150R_1%_0.125W_100PPM, Mounted=Yes, Part Description="General Purpose Thick Film Chip Resistor", Part Number=R0805_150R_1%_0.125W_100PPM, Pin Count=2, PressFit=No, Sense=No, SMD=Yes, Socket=No, Status=Preferred, TC=±100ppm/°C
TR1: library part XFMR_MINI-CIRCUITS_TC1-1-13M+, "50 Ohms 4.5 To 3000MHz RF Transformers", Manufacturer=MINI-CIRCUITS, Manufacturer Part Number=TC1-1-13M+, Author="CERN DEM JLC", ComponentHeight=3.81mm, Component Type=Standard, CreateDate=2011-11-30, HelpURL=\\cern.ch\dfs\Applications\Altium\Datasheets\XFMR_MINI-CIRCUITS_TC1-1-13M+.pdf, LatestRevisionDate=2011-11-30, Mounted=Yes, Part Description="50 Ohms 4.5 To 3000MHz RF Transformers", Part Number=XFMR_MINI-CIRCUITS_TC1-1-13M+, Pin Count=5, SMD=Yes, Socket=No, Status=None, Table=Transformers

## Via types
v1: diameter 0.6, hole 0.3, TOP to BOT, tented both sides, 395 vias
v2: diameter 0.5, hole 0.2, TOP to BOT, tented both sides, 13 vias
v3: diameter 0.7, hole 0.3, TOP to BOT, tented both sides, 7 vias
v4: diameter 0.7, hole 0.4, TOP to BOT, tented both sides, 6 vias

## Nets (pads, with @x,y where several pads share a name; then routed paths per layer and width w, separated by ;. In a path a pad name is that pad's centre, name@x,y a point inside that pad or via, vN(x,y) a via of type N, cw(c..) or ccw(c..) an arc to the next point about the centre after c; other vN are vias at no path point)
CMP_N: IC27.3 TR1.3 | length 22.2
  TOP w0.259: IC27.3 93.959,-24.471 94.003,-24.427 94.003,-22.217 97.735,-18.485 100.348,-18.485 104.001,-22.138 107.556,-22.138 107.707,-21.987 107.707,-21.105 107.394,-20.792 107.279,-20.792 106.643,-20.155 TR1.3
CMP_P: IC27.2 TR1.1 | length 22.3
  TOP w0.259: IC27.2 94.459,-24.471 94.414,-24.427 94.414,-22.387 97.905,-18.897 100.178,-18.897 103.831,-22.55 107.726,-22.55 108.119,-22.157 108.119,-20.943 108.247,-20.815 108.409,-20.815 108.438,-20.785 108.553,-20.785 109.183,-20.155 TR1.1
GND: C1.1 C2.1 C3.1 C4.2 C5.2 C6.2 C7.2 C8.1 C16.2 C17.1 C18.2 C19.2 C20.2 C21.2 C22.2 C23.2 C25.2 C26.1 C129.2 C137.1 C138.1 C139.1 D3.2 IC2.2 IC2.4 IC3.2 IC3.4 IC4.2 IC4.4 IC5.2 IC5.4 IC6.2 IC27.13 IC27.15 IC27.17 J1.1 J1.4 J1.7 J1.8 J2.3 J3.2 J15.1 J15.4 J15.7 J15.8 MSBOX1.1 MSBOX1.2 MSBOX1.3 MSBOX1.4 MSBOX1.5 MSBOX1.6 MSBOX1.7 MSBOX1.8 MSBOX1.9 MSBOX1.10 MSBOX1.11 MSBOX1.12 R10.1 R16.1 R18.2 | length 7.3
  TOP w0.152: IC5.2 33.885,-30.916 33.885,-29.742 ; v1(96.672,-27.254) 96.581,-27.254 96.309,-26.983 IC27.13 95.319,-26.983 95.197,-26.861 94.837,-26.861 v2(94.695,-26.719) v2(94.209,-26.233) 94.37,-26.071 95.23,-26.071 95.319,-25.983 IC27.15 96.984,-25.983 C21.2
  other v1: 58.115,-46.99 3.182,-46.969 6.182,-46.969 9.182,-46.969 12.182,-46.969 15.182,-46.969 18.182,-46.969 39.182,-46.969 42.182,-46.969 45.182,-46.969 48.182,-46.969 51.182,-46.969 60.182,-46.969 63.182,-46.969 66.182,-46.969 69.182,-46.969 72.182,-46.969 75.182,-46.969 78.182,-46.969 81.182,-46.969 84.182,-46.969 87.182,-46.969 90.182,-46.969 93.182,-46.969 96.182,-46.969 99.182,-46.969 102.182,-46.969 105.182,-46.969 108.182,-46.969 111.182,-46.969 114.182,-46.969 54.504,-46.685 56.768,-46.685 56.838,-45.69 59.462,-45.69 61.239,-45.69 56.768,-44.602 59.488,-44.48 4.682,-43.969 10.682,-43.969 13.682,-43.969 16.682,-43.969 34.682,-43.969 109.682,-43.969 112.682,-43.969 28.961,-42.643 57.988,-41.241 114.262,-41.084 112.809,-41.021 3.182,-40.969 6.182,-40.969 9.182,-40.969 12.182,-40.969 24.182,-40.969 27.182,-40.969 48.182,-40.969 54.182,-40.969 57.182,-40.969 60.182,-40.969 63.182,-40.969 66.182,-40.969 69.182,-40.969 72.182,-40.969 75.182,-40.969 78.182,-40.969 81.182,-40.969 84.182,-40.969 87.182,-40.969 90.182,-40.969 93.182,-40.969 96.182,-40.969 99.182,-40.969 102.182,-40.969 105.182,-40.969 108.182,-40.969 111.182,-40.969 117.182,-40.969 29.261,-40.141 22.022,-38.586 7.682,-37.969 13.682,-37.969 16.682,-37.969 25.682,-37.969 28.682,-37.969 37.682,-37.969 49.682,-37.969 55.682,-37.969 58.682,-37.969 61.682,-37.969 64.682,-37.969 67.682,-37.969 70.682,-37.969 73.682,-37.969 76.682,-37.969 79.682,-37.969 82.682,-37.969 85.682,-37.969 88.682,-37.969 91.682,-37.969 94.682,-37.969 97.682,-37.969 100.682,-37.969 103.682,-37.969 106.682,-37.969 109.682,-37.969 114.325,-37.274 112.809,-37.211 3.182,-34.969 6.182,-34.969 9.182,-34.969 12.182,-34.969 24.182,-34.969 27.182,-34.969 36.182,-34.969 39.182,-34.969 42.182,-34.969 45.182,-34.969 48.182,-34.969 54.182,-34.969 57.182,-34.969 60.182,-34.969 63.182,-34.969 66.182,-34.969 69.182,-34.969 72.182,-34.969 75.182,-34.969 78.182,-34.969 81.182,-34.969 84.182,-34.969 87.182,-34.969 90.182,-34.969 117.182,-34.969 114.389,-33.401 112.809,-33.201 22.022,-33.072 31.135,-32.181 33.785,-32.181 4.682,-31.969 7.682,-31.969 10.682,-31.969 13.682,-31.969 16.682,-31.969 19.682,-31.969 22.682,-31.969 25.682,-31.969 37.682,-31.969 49.682,-31.969 55.682,-31.969 58.682,-31.969 61.682,-31.969 64.682,-31.969 67.682,-31.969 70.682,-31.969 73.682,-31.969 76.682,-31.969 79.682,-31.969 82.682,-31.969 85.682,-31.969 88.682,-31.969 91.682,-31.969 103.682,-31.969 106.682,-31.969 109.682,-31.969 112.682,-31.969 8.896,-31.589 30.385,-29.339 90.298,-29.257 17.211,-29.136 3.182,-28.969 6.182,-28.969 12.182,-28.969 21.182,-28.969 39.182,-28.969 48.182,-28.969 54.182,-28.969 57.182,-28.969 60.182,-28.969 63.182,-28.969 66.182,-28.969 69.182,-28.969 72.182,-28.969 75.182,-28.969 78.182,-28.969 81.182,-28.969 84.182,-28.969 87.182,-28.969 99.182,-28.969 102.182,-28.969 105.182,-28.969 108.182,-28.969 111.182,-28.969 114.182,-28.969 117.182,-28.969 10.196,-28.936 14.961,-27.686 4.682,-25.969 7.682,-25.969 40.682,-25.969 43.682,-25.969 46.682,-25.969 49.682,-25.969 55.682,-25.969 58.682,-25.969 61.682,-25.969 64.682,-25.969 67.682,-25.969 70.682,-25.969 73.682,-25.969 76.682,-25.969 79.682,-25.969 82.682,-25.969 85.682,-25.969 100.682,-25.969 88.381,-25.833 99.695,-25.833 89.735,-23.388 3.182,-22.969 6.182,-22.969 18.182,-22.969 21.182,-22.969 24.182,-22.969 27.182,-22.969 30.182,-22.969 33.182,-22.969 36.182,-22.969 39.182,-22.969 42.182,-22.969 45.182,-22.969 48.182,-22.969 60.182,-22.969 66.182,-22.969 72.182,-22.969 87.182,-22.969 102.182,-22.969 111.182,-22.969 114.182,-22.969 117.182,-22.969 98.59,-21.038 40.996,-20.142 31.135,-20.099 34.028,-20.099 44.042,-20.099 4.682,-19.969 10.682,-19.969 13.682,-19.969 19.682,-19.969 22.682,-19.969 25.682,-19.969 28.682,-19.969 37.682,-19.969 46.682,-19.969 49.682,-19.969 58.682,-19.969 61.682,-19.969 64.682,-19.969 67.682,-19.969 70.682,-19.969 73.682,-19.969 76.682,-19.969 79.682,-19.969 82.682,-19.969 85.682,-19.969 88.682,-19.969 91.682,-19.969 103.682,-19.969 112.682,-19.969 115.682,-19.969 118.682,-19.969 56.767,-18.575 58.539,-17.303 3.182,-16.969 6.182,-16.969 9.182,-16.969 12.182,-16.969 21.182,-16.969 30.182,-16.969 33.182,-16.969 36.182,-16.969 39.182,-16.969 42.182,-16.969 45.182,-16.969 48.182,-16.969 54.182,-16.969 60.182,-16.969 66.182,-16.969 69.182,-16.969 72.182,-16.969 75.182,-16.969 78.182,-16.969 81.182,-16.969 84.182,-16.969 87.182,-16.969 90.182,-16.969 93.182,-16.969 96.182,-16.969 99.182,-16.969 102.182,-16.969 105.182,-16.969 108.182,-16.969 111.182,-16.969 114.182,-16.969 117.182,-16.969 63.168,-16.501 75.786,-16.501 4.682,-13.969 7.682,-13.969 10.682,-13.969 19.682,-13.969 22.682,-13.969 28.682,-13.969 34.682,-13.969 37.682,-13.969 40.682,-13.969 46.682,-13.969 49.682,-13.969 58.682,-13.969 67.682,-13.969 70.682,-13.969 73.682,-13.969 79.682,-13.969 82.682,-13.969 85.682,-13.969 88.682,-13.969 91.682,-13.969 94.682,-13.969 100.682,-13.969 115.682,-13.969 6.182,-10.969 9.182,-10.969 12.182,-10.969 15.182,-10.969 18.182,-10.969 36.182,-10.969 39.182,-10.969 60.182,-10.969 66.182,-10.969 72.182,-10.969 78.182,-10.969 99.182,-10.969 105.182,-10.969 108.182,-10.969 111.182,-10.969 114.182,-10.969 61.943,-9.582 64.168,-9.568 22.885,-8.915 106.974,-8.562 96.764,-8.331 75.786,-8.073 63.168,-8.024 43.682,-7.969 46.682,-7.969 49.682,-7.969 58.682,-7.969 61.682,-7.969 64.682,-7.969 70.682,-7.969 73.682,-7.969 85.682,-7.969 88.682,-7.969 91.682,-7.969 94.682,-7.969 97.682,-7.969 109.682,-7.969 112.682,-7.969 115.682,-7.969 118.682,-7.969 63.957,-7.199 76.249,-6.936 85.141,-6.604 96.309,-5.981 57.352,-5.643 59.353,-5.643 3.182,-4.969 15.182,-4.969 18.182,-4.969 21.182,-4.969 24.182,-4.969 27.182,-4.969 30.182,-4.969 33.182,-4.969 36.182,-4.969 39.182,-4.969 42.182,-4.969 45.182,-4.969 48.182,-4.969 60.182,-4.969 87.182,-4.969 111.182,-4.969 114.182,-4.969
  other v2: 93.762,-26.683 93.707,-25.767 94.695,-25.769
  other v3: 24.172,-44.966 39.219,-42.291 34.678,-29.339 65.557,-13.586 72.182,-13.489 60.681,-13.425 69.551,-11.174
  other v4: 74.737,-15.081 64.438,-15.003 76.887,-15.003 61.943,-14.954 74.737,-9.645 76.866,-9.612
NetC1_2: C1.2 R1.1 R8.2 R20.2 | length 4.7
  TOP w0.259: C1.2 69.938,-6.045 69.982,-6 70.09,-6 R1.1
NetC2_2: C2.2 R2.1 R6.2 R7.2 | length 5.3
  TOP w1: C2.2@78.802,-8.024 78.802,-6.099 78.852,-6.049 80.064,-6.049 80.526,-6.511 R7.2@81.923,-6.511
NetC3_2: C3.2 R3.1 R19.2 R21.2 | length 4.9
  TOP w1: C3.2 100.501,-6.031 102.482,-6.031 103.352,-6.031 103.428,-5.955 R3.1@103.671,-5.955
NetC4_1: C4.1 C5.1 D2.K L1.1 R5.2 | length 44.5
  TOP w0.152: 28.598,-27.686 29.261,-28.349 R5.2
  TOP w1.016: C4.1 8.896,-24.294 9.491,-24.889 24.352,-24.889 25.061,-25.598 C5.1 28.598,-27.686 29.561,-26.723 D2.K ; C4.1@9.288,-22.013 15,-22.013 15.596,-21.418 15.596,-16.311 L1.1
NetC9_1: C9.1 C14.1 FB2.1 IC3.3 R11.1 | length 16.4
  TOP w1: IC3.3 81.597,-12.299 83.406,-10.49 86.975,-10.49 87.229,-10.744 C14.1 ; R11.1 C14.1 ; C9.1 90.666,-10.013 90.024,-9.371 88.094,-9.371 87.254,-10.212 C14.1
NetC9_2: C9.2 C11.2 IC4.1 | length 3.6
  TOP w1: C9.2 92.241,-10.679 92.114,-10.806 C11.2 93.639,-12.305 93.665,-12.33 IC4.1
NetC10_1: C10.1 D3.1 FB5.2 | length 3.1
  TOP w1: D3.1 FB5.2 ; D3.1@57.142,-13.803 D3.1@57.165,-13.826
NetC10_2: C10.2 IC2.1 | length 1.9
  TOP w1: C10.2 58.564,-12.274 58.576,-12.285 IC2.1
NetC11_1: C11.1 C14.2 R11.2 | length 3.2
  TOP w1: C14.2 R11.2 C11.1
NetC12_1: C12.1 IC3.1 | length 1.9
  TOP w1: C12.1 72.663,-12.325 72.688,-12.299 IC3.1
NetC12_2: C12.2 FB3.1 IC2.3 | length 3.7
  TOP w1: IC2.3 69.511,-12.285 69.551,-12.325 C12.2
NetC13_1: C13.1 C15.2 FB4.1 IC4.3 | length 5.3
  TOP w1: IC4.3 103.1,-12.33 103.176,-12.406 C15.2 103.201,-13.916 C13.1
NetC13_2: C13.2 TR1.6 | length 6.5
  TOP w1: C13.2 108.387,-13.946 109.183,-14.742 TR1.6
NetC15_1: C15.1 R14.1 | length 2.3
  TOP w1: C15.1 105.871,-12.406 105.947,-12.33 R14.1
NetC16_1: C16.1 IC5.3 | length 2
  TOP w0.508: IC5.3 32.5,-29.542 32.828,-29.214 C16.1
NetC19_1: C19.1 TR1.4 | length 2.4
  TOP w1: C19.1 105.605,-15.492 106.318,-16.205 106.523,-16.205 106.643,-16.325 TR1.4
NetC20_1: C20.1 C21.1 C26.2 FB7.2 IC27.5 IC27.16 R17.2 | length 15.5
  TOP w0.259: R17.2 89.435,-27.433 89.755,-27.112 89.805,-27.112 90.235,-26.683 90.235,-25.427 90.303,-25.359 90.303,-25.216 90.468,-25.051 90.611,-25.051 C20.1@91.335,-24.327 ; C20.1 C20.1@91.335,-24.327 ; v2(92.709,-24.983) 92.734,-25.008 92.734,-25.464 IC27.5@92.753,-25.483 ; IC27.5 IC27.5@92.753,-25.483 ; IC27.16 95.947,-25.483 95.966,-25.464 95.966,-25.401 96.764,-24.603 96.764,-24.578 97.109,-24.233 C21.1 C26.2 100.299,-24.233 FB7.2 ; C20.1@91.335,-24.327 91.68,-24.673 91.705,-24.673 92.451,-25.418 92.451,-25.464 92.47,-25.483 IC27.5@92.753,-25.483
  BOT w0.259: v2(92.709,-24.983) 96.333,-24.983 v2(96.346,-24.996)
NetC22_1: C22.1 C23.1 C139.2 FB6.2 IC27.9 IC27.12 | length 14.2
  TOP w0.259: v2(92.834,-27.733) 93.44,-27.733 IC27.9@93.459,-27.714 ; C23.1 92.977,-29.205 93.459,-28.723 IC27.9@93.459,-27.714 ; IC27.9 IC27.9@93.459,-27.714 ; v2(95.709,-27.608) 95.643,-27.608 95.568,-27.683 IC27.12 94.959,-28.48 95.338,-28.859 95.363,-28.859 95.709,-29.205 C22.1 95.682,-29.257 C139.2 95.682,-31.467 96.209,-31.994 99.288,-31.994 FB6.2
  BOT w0.259: v2(92.834,-27.733) 92.959,-27.608 v2(95.709,-27.608)
NetC24_1: C24.1 IC27.11 | length 4.7
  TOP w0.259: IC27.11 94.459,-32.322 C24.1
NetC25_1: C25.1 IC27.1 IC27.4 | length 6.7
  TOP w0.152: v2(93.334,-24.083) 93.459,-24.207 IC27.4
  TOP w0.259: IC27.1 94.959,-24.703 94.978,-24.684 95.204,-24.684 95.489,-24.399 v2@95.489,-24.083 ; v2(95.509,-24.083) 96.109,-23.483 96.547,-23.483 97.045,-22.984 97.089,-22.984 C25.1
  BOT w0.152: v2(93.334,-24.083) 93.373,-24.083 93.597,-24.307 95.246,-24.307 95.47,-24.083 v2(95.509,-24.083)
NetC127_2: C127.2 IC27.10 | length 4.8
  TOP w0.259: C127.2 93.727,-32.177 93.727,-31.88 93.959,-31.648 IC27.10
NetC138_2: C138.2 IC6.3 R22.2 R23.2 | length 5.5
  TOP w1: R22.2@52.638,-43.893 52.414,-44.117 52.414,-44.221 55.163,-44.221 56.438,-42.946 56.438,-42.635 56.488,-42.585 IC6.3
NetD1_A: D1.A J2.1 | length 4.6
  TOP w1: J2.1 10.696,-38.262 11.019,-38.586 12.376,-38.586 13.322,-39.531 13.572,-39.531 13.822,-39.781 D1.A
NetD2_A: D2.A IC5.1 L2.2 | length 11.7